# EAGLE board Power conditioning breakout (EAGLE 7.2.0)
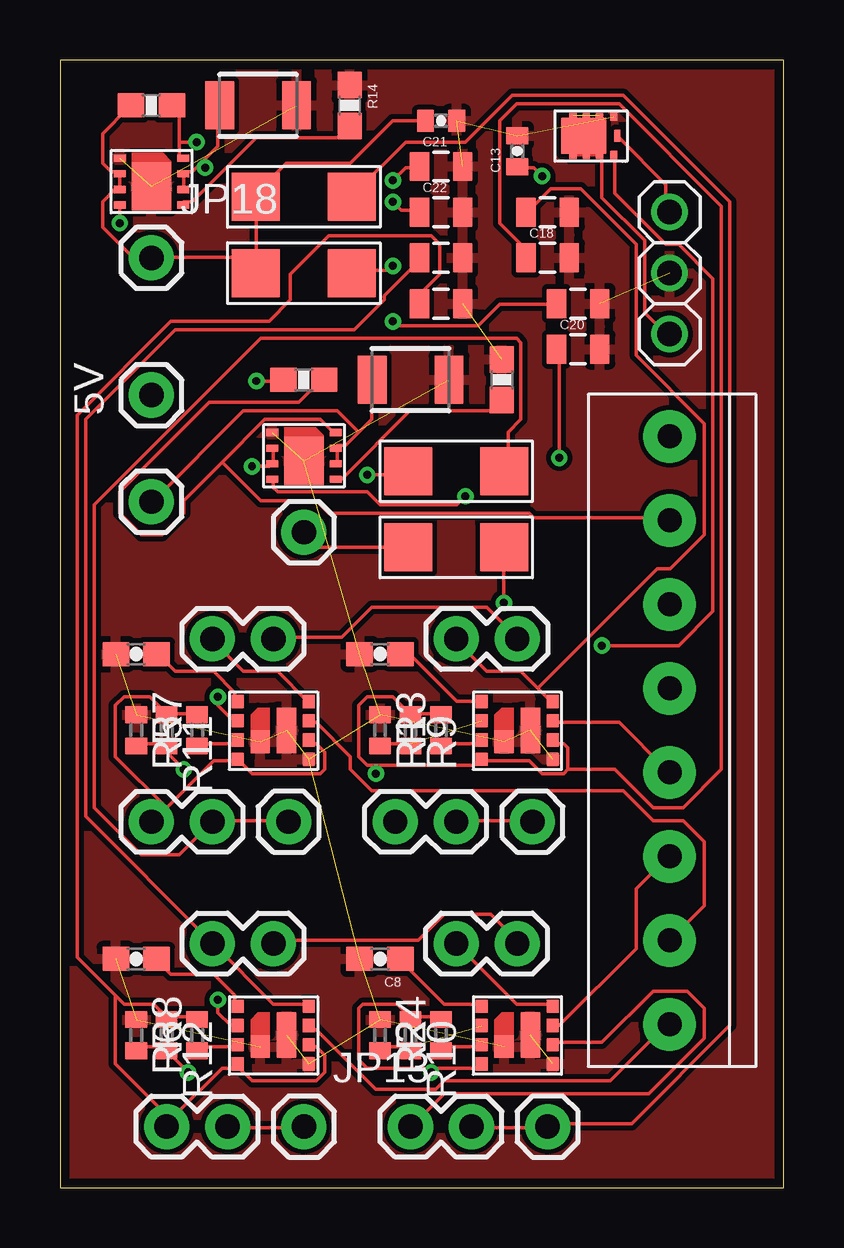
[diagram p0: board, top side]
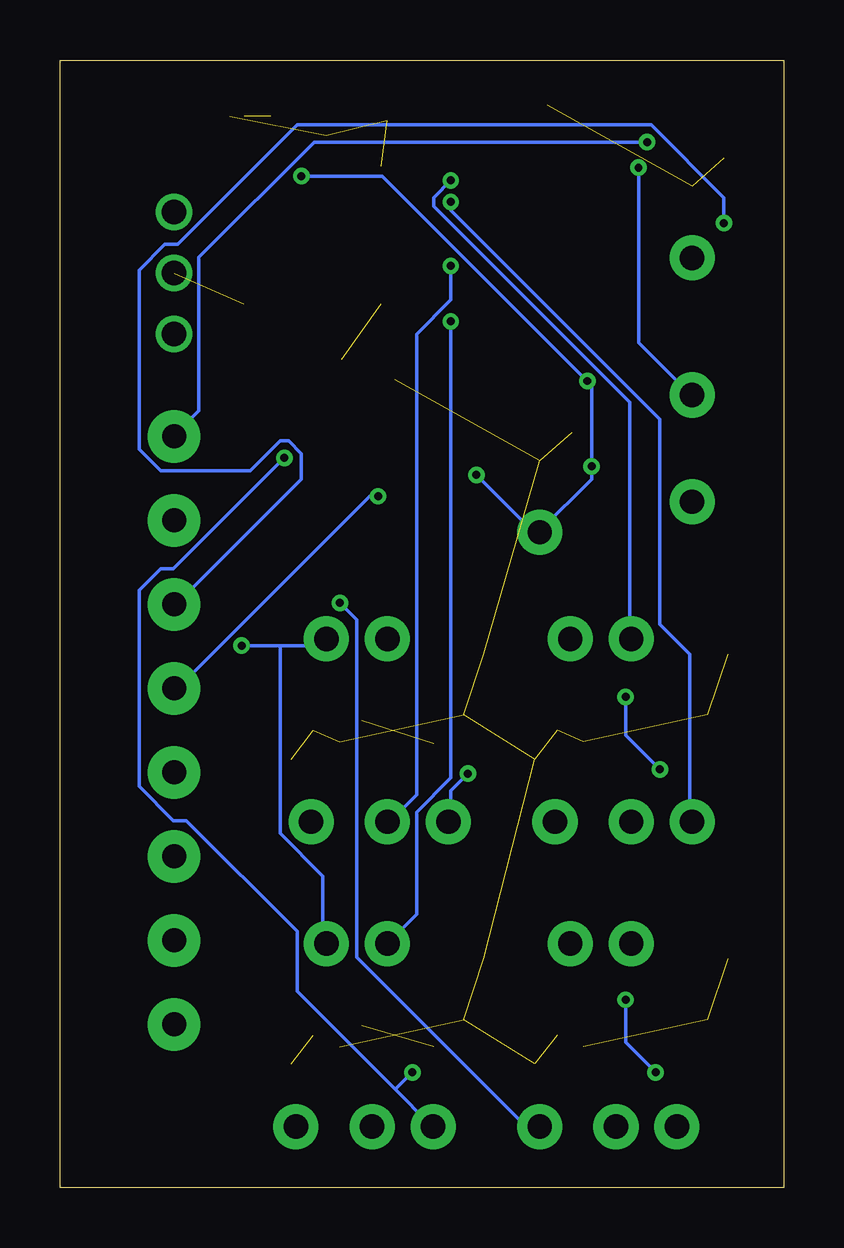
[diagram p1: board, bottom side, seen from below]

Size 30.15 x 46.98 mm. Coordinates in mm from the lower left corner, seen from the top.
Outline: 0,0 30.15,0 30.15,46.98 0,46.98 0,0
Copper layers (1*16): Top 0.0356mm / dielectric 1.5011mm / Bottom 0.0356mm
Design rules "LaenPCBOrder *": minimum track width 6mil, minimum drill 13mil, track to track 8mil, track to pad 8mil, pad to pad 8mil, via to via 8mil, smd to smd 8mil, copper to edge 15mil, drill to drill 6mil, minimum pad ring 7mil, minimum via ring 7mil, stop-mask expansion 3mil, vias tented up to drill 0mil, thermal gap 10mil

## Footprints (pad centres in the part's own frame; a part is rotated, then mirrored left to right if it is on the bottom)
1X01 = drill 1.016 pad 1.88: 1 0,0
1210 = smd 1.2 x 2: 1 -1.6,0; 2 1.6,0
0603-CAP = smd 1.1 x 1: 1 -0.85,0; 2 0.85,0
0805 = smd 0.8 x 1.2: 1 -0.9,0; 2 0.9,0
0402-CAP = smd 0.7 x 0.9: 1 -0.65,0; 2 0.65,0
1X08-3.5MM = drill 1 pad 2.184: 1 -12.25,0; 2 -8.75,0; 3 -5.25,0; 4 -1.75,0; 5 1.75,0; 6 5.25,0; 7 8.75,0; 8 12.25,0
1X03 = drill 1.016: 1 -2.54,0; 2 0,0; 3 2.54,0
1X02 = drill 1.016 pad 1.88: 1 0,0; 2 2.54,0
R0402 = smd 0.7 x 0.9: 1 -0.65,0; 2 0.65,0
0603-RES = smd 1.1 x 1: 1 -0.85,0; 2 0.85,0
CHIPFET = smd 1.5 x 1.87: P$1 0,0.4 | smd 0.2 x 0.3: P$2 -0.85,0.85; P$3 -0.85,0.3; P$4 -0.85,-0.25; P$8 0.85,-0.25; P$9 0.85,0.3; P$10 0.85,0.85 | smd 0.35 x 0.3: P$5 -0.8,-0.85; P$7 0.8,-0.85 | smd 0.5 x 0.25: P$6 0,-1
LMZ21701 = smd 0.5 x 0.55: P$1 -1.475,1.2; P$2 -1.475,0.4; P$3 -1.475,-0.4; P$4 -1.475,-1.2; P$5 1.475,-1.2; P$6 1.475,-0.4; P$7 1.475,0.4; P$8 1.475,1.2 | smd 0.8 x 1.9: P$9 0.55,0 | smd 0.8 x 0.95: P$10 -0.55,-0.475
TPS2556 = smd 0.5 x 0.3: P$1 -1.325,0.975; P$2 -1.325,0.325; P$3 -1.325,-0.325; P$4 -1.325,-0.975; P$5 1.325,-0.975; P$6 1.325,-0.325; P$7 1.325,0.325; P$8 1.325,0.975 | smd 1.65 x 2: P$9 0,-0.2
DO-214AC-SMA = smd 2 x 2: P$1 -2,0; P$2 2,0

## Placement (x,y rotation side)
5V  M01PTH  [1X01]  3.81,33.02 0 top
C3  150uF  [1210]  8.26,45.09 180 top
C4  150uF  [1210]  14.61,33.66 180 top
C5  3.3nF  [0603-CAP]  3.17,22.23 180 top
C6  3.3nF  [0603-CAP]  3.17,9.53 180 top
C7  3.3nF  [0603-CAP]  13.34,22.23 180 top
C8  3.3nF  [0603-CAP]  13.34,9.53 180 top
C9  22uF  [0805]  20.32,40.64 0 top
C13  .1uF  [0402-CAP]  19.05,43.18 90 top
C14  .1uF  [0402-CAP]  15.88,44.45 0 top
C18  22uF  [0805]  20.32,38.73 0 top
C19  22uF  [0805]  21.59,36.83 0 top
C20  22uF  [0805]  21.59,34.92 0 top
C21  22uF  [0805]  15.88,42.55 0 top
C22  22uF  [0805]  15.88,40.64 0 top
C23  22uF  [0805]  15.88,38.73 0 top
C24  22uF  [0805]  15.88,36.83 0 top
JP1  [1X08-3.5MM]  25.4,19.05 90 top
JP2  [1X03]  25.4,38.1 90 top
JP4  M01PTH  [1X01]  3.81,28.57 270 top
JP11  M01PTH  [1X01]  10.16,27.3 0 top
JP12  M01PTH  [1X01]  9.53,15.24 0 top
JP13  M01PTH  [1X01]  10.16,2.54 0 top
JP16  M01PTH  [1X01]  19.68,15.24 0 top
JP17  M01PTH  [1X01]  20.32,2.54 0 top
JP18  M01PTH  [1X01]  3.81,38.73 0 top
JP19  M02PTH  [1X02]  6.35,10.16 0 top
JP20  M02PTH  [1X02]  6.99,2.54 180 top
JP21  M02PTH  [1X02]  6.35,22.86 0 top
JP22  M02PTH  [1X02]  3.81,15.24 0 top
JP23  M02PTH  [1X02]  16.51,22.86 0 top
JP24  M02PTH  [1X02]  16.51,15.24 180 top
JP25  M02PTH  [1X02]  19.05,10.16 180 top
JP26  M02PTH  [1X02]  17.14,2.54 180 top
R1  180K  [R0402]  13.34,19.05 270 top
R2  180K  [R0402]  13.34,6.35 270 top
R3  10K  [R0402]  15.88,19.05 90 top
R4  10K  [R0402]  15.88,6.35 90 top
R5  180K  [R0402]  3.17,19.05 270 top
R6  180K  [R0402]  3.17,6.35 270 top
R7  10K  [R0402]  5.71,19.05 90 top
R8  10K  [R0402]  5.71,6.35 90 top
R9  1.02M  [R0402]  14.61,19.05 270 top
R10  1.02M  [R0402]  14.61,6.35 270 top
R11  634K  [R0402]  4.45,19.05 270 top
R12  634K  [R0402]  4.45,6.35 270 top
R13  20K  [0603-RES]  18.41,33.66 270 top
R14  20K  [0603-RES]  12.06,45.09 270 top
R15  100K  [0603-RES]  10.16,33.66 180 top
R16  100K  [0603-RES]  3.81,45.09 180 top
U$1  SI5410DU  [CHIPFET]  22.23,43.81 90 top
U$2  LMZ21701  [LMZ21701]  19.05,19.05 0 top
U$3  LMZ21701  [LMZ21701]  19.05,6.35 0 top
U$4  LMZ21701  [LMZ21701]  8.89,19.05 0 top
U$5  LMZ21701  [LMZ21701]  8.89,6.35 0 top
U$6  TPS2556  [TPS2556]  3.81,41.91 0 top
U$7  TPS2556  [TPS2556]  10.16,30.48 0 top
U$8  MBRA210LT3  [DO-214AC-SMA]  16.51,26.67 0 top
U$9  MBRA210LT3  [DO-214AC-SMA]  16.51,29.84 0 top
U$10  MBRA210LT3  [DO-214AC-SMA]  10.16,38.1 0 top
U$11  MBRA210LT3  [DO-214AC-SMA]  10.16,41.27 0 top

## Library data of the parts
5V JP4 JP11-JP13 JP16-JP26 = SparkFun-Connectors
C3 C4 = SparkFun-Capacitors; PROD_ID: CAP-09827
C5-C8 = SparkFun-Capacitors; PROD_ID: CAP-09633
C9 C18-C24 = SparkFun-Capacitors; PROD_ID: CAP-08402
C13 C14 R13-R16 = SparkFun-Passives
JP1 JP2 = adafruit
R1-R12 = resistor
U$1-U$11 = RitLaunchInitiative

## Nets
3.3V: C13.1 JP11.1 R15.2 U$7.P$2 U$7.P$3 U$8.P$1 U$9.P$1
+5V: C14.1 JP18.1 R16.2 U$6.P$2 U$6.P$3 U$10.P$1 U$11.P$1
EN1: JP2.3 U$1.P$6
EN31: JP1.1 U$5.P$7
EN32: JP1.2 U$4.P$7
EN51: JP1.3 U$3.P$7
EN52: JP1.4 U$2.P$7
ENT1: JP1.5 U$7.P$4
ENT2: JP1.6 U$6.P$4
F1: JP1.7 R15.1 U$7.P$8
F2: JP1.8 R16.1 U$6.P$8
GND: C3.1 C4.1 C5.2 C6.2 C7.2 C8.2 C9.2 C13.2 C14.2 C18.2 C19.2 C20.2 C21.2 C22.2 C23.2 C24.2 JP2.2 R1.1 R2.1 R5.1 R6.1 R13.1 R14.1 U$1.P$7 U$2.P$5 U$2.P$9 U$2.P$10 U$3.P$5 U$3.P$9 U$3.P$10 U$4.P$5 U$4.P$9 U$4.P$10 U$5.P$5 U$5.P$9 U$5.P$10 U$6.P$1 U$6.P$9 U$7.P$1 U$7.P$9
N$1: C20.1 JP26.2 R4.2 R10.1 U$3.P$4 U$3.P$6
N$2: R4.1 U$3.P$3
N$3: R3.1 U$2.P$3
N$4: R1.2 R9.2 U$2.P$2
N$5: C4.2 JP4.1 U$7.P$6 U$7.P$7
N$6: C7.1 U$2.P$1
N$7: U$1.P$8 U$1.P$9 U$1.P$10
N$8: R5.2 R11.2 U$4.P$2
N$9: R2.2 R10.2 U$3.P$2
N$10: JP12.1 JP22.2 U$9.P$2
N$11: C8.1 U$3.P$1
N$12: C5.1 U$4.P$1
N$13: R7.1 U$4.P$3
N$14: 5V.1 C3.2 U$6.P$6 U$6.P$7
N$15: JP2.1 U$1.P$1 U$1.P$2 U$1.P$3 U$1.P$4
N$16: R13.2 U$7.P$5
N$17: R14.2 U$6.P$5
N$18: C22.1 JP22.1 R7.2 R11.1 U$4.P$4 U$4.P$6
N$19: C6.1 U$5.P$1
N$20: C21.1 JP21.1 U$4.P$8
N$21: C24.1 JP20.2 R8.2 R12.1 U$5.P$4 U$5.P$6
N$22: R8.1 U$5.P$3
N$23: R6.2 R12.2 U$5.P$2
N$24: C23.1 JP19.1 U$5.P$8
N$25: JP13.1 JP20.1 U$8.P$2
N$26: JP16.1 JP24.1 U$10.P$2
N$27: JP17.1 JP26.1 U$11.P$2
N$28: C9.1 JP23.1 U$2.P$8
N$29: C19.1 JP25.2 U$3.P$8
N$31: C18.1 JP24.2 R3.2 R9.1 U$2.P$4 U$2.P$6
VIN: JP19.2 JP21.2 JP23.2 JP25.1 U$1.P$5

## Tracks (layer width: path | path; a pad name or v marks a point on that pad's centre or on a via)
3.3V  (via drill 0.33)
  Top 0.152: U$7.P$2 8.89,30.76 8.89,30.23 U$7.P$3 8.71,30.05 v8,30.05 | v20.09,42.14 19.74,42.49 19.2,42.49 C13.1 | v8.18,33.6 9.25,33.6 R15.2 | U$8.P$1 10.85,26.67 10.31,27.2 JP11.1 | v12.8,29.69 14.4,29.69 U$9.P$1
  Bottom 0.152: v20.09,42.14 16.71,42.14 v8.18,33.6 8,33.43 v8,30.05 8,29.52 10.13,27.38 JP11.1 10.31,27.2 v12.8,29.69
+5V
  Top 0.152: R16.2 2.85,44.98 1.78,43.92 1.78,42.67 2.13,42.32 2.31,42.32 U$6.P$2 2.49,42.14 2.49,41.6 U$6.P$3 2.31,41.6 1.78,41.07 1.78,40.01 3.02,38.76 3.73,38.76 JP18.1 3.91,38.76 8.18,38.76 | C14.1 13.87,44.45 12.09,42.67 9.42,42.67 8.18,41.43 U$11.P$1 8.18,41.25 8.18,38.76 | 8.18,38.76 8.18,38.23 U$10.P$1 8.18,38.76
EN1
  Top 0.152: U$1.P$6 23.29,43.74 25.25,41.78 25.25,40.72 JP2.3
EN31
  Top 0.152: U$5.P$7 10.49,6.58 10.67,6.58 13.16,4.09 15.65,4.09 16,4.45 22.94,4.45 25.25,6.76 JP1.1
EN32
  Top 0.152: U$4.P$7 10.49,19.38 10.67,19.38 12.09,17.96 12.09,17.42 12.98,16.54 23.47,16.54 24.71,15.29 25.96,15.29 26.85,14.4 26.85,11.73 25.43,10.31 JP1.2
EN51
  Top 0.152: U$3.P$7 20.62,6.76 20.8,6.76 24,9.96 24,12.45 25.25,13.69 JP1.3
EN52
  Top 0.152: U$2.P$7 20.62,19.38 23.29,19.38 25.25,17.42 JP1.4
ENT1  (via drill 0.33)
  Top 0.152: v16.89,28.8 16.54,28.45 13.34,28.45 12.8,28.98 9.07,28.98 8.89,29.16 8.89,29.52 U$7.P$4
  Bottom 0.152: v16.89,28.8 17.25,28.8 25.25,20.8 JP1.5
ENT2  (via drill 0.33)
  Top 0.152: v2.49,40.18 2.49,40.89 U$6.P$4
  Bottom 0.152: v2.49,40.18 2.49,41.25 5.51,44.27 20.27,44.27 25.25,39.29 25.78,39.29 26.85,38.23 26.85,30.76 25.96,29.87 22.23,29.87 20.98,31.11 20.62,31.11 20.09,30.58 20.09,29.52 25.25,24.36 JP1.6
F1
  Top 0.152: 6.76,30.23 5.16,28.63 5.16,28.09 4.27,27.2 3.38,27.2 2.49,28.09 2.49,28.98 6.22,32.72 9.96,32.72 10.85,33.6 R15.1 | 6.76,30.23 8.53,32 10.85,32 11.38,31.47 U$7.P$8 | 6.76,30.23 8.36,28.63 10.67,28.63 11.2,28.09 19.56,28.09 19.74,27.91 25.25,27.91 JP1.7
F2  (via drill 0.33)
  Top 0.152: 4.98,43.56 4.98,44.81 4.8,44.98 R16.1 | 4.98,43.56 4.98,43.03 U$6.P$8 | v5.69,43.56 4.98,43.56
  Bottom 0.152: v5.69,43.56 19.56,43.56 24.36,38.76 24.36,32.36 25.25,31.47 JP1.8
GND  (27 unrouted)
  pour Top: -1.27,48.26 -1.27,-1.27 31.75,-1.27 31.75,48.26
N$1  (via drill 0.33)
  Top 0.152: 15.47,4.98 12.8,4.98 12.45,5.33 12.45,7.47 12.62,7.64 14.05,7.64 14.58,7.11 R10.1 14.76,7.11 15.82,7.11 R4.2 | 15.47,4.98 17.42,4.98 U$3.P$4 | U$3.P$6 20.62,6.04 22.58,6.04 24.71,8.18 26.14,8.18 26.85,7.47 26.85,6.22 24.54,3.91 16,3.91 14.76,2.67 JP26.2 | v20.8,30.4 20.8,34.85 C20.1 | v15.47,4.8 15.47,4.98
  Bottom 0.152: v20.8,30.4 25.43,25.78 25.96,25.78 26.85,24.89 26.85,16.71 25.43,15.29 24.89,15.29 20.27,10.67 20.27,8.18 16.18,4.09 | 16.18,4.09 14.76,2.67 JP26.2 | 16.18,4.09 v15.47,4.8
N$2
  Top 0.152: U$3.P$3 17.42,5.87 16,5.87 R4.1
N$3
  Top 0.152: U$2.P$3 17.42,18.49 16,18.49 R3.1
N$4  (1 unrouted)
  Top 0.152: R1.2 13.34,18.49 14.58,18.49 R9.2
N$5
  Top 0.152: U$7.P$6 11.56,30.23 11.56,30.76 U$7.P$7 11.56,30.94 11.91,30.94 12.45,31.47 | 12.45,31.47 12.98,32 12.98,33.6 C4.2 | 12.45,31.47 11.56,32.36 7.64,32.36 3.91,28.63 JP4.1
N$6
  Top 0.152: C7.1 14.58,22.23 16.54,20.27 17.42,20.27 U$2.P$1
N$7  (2 unrouted)
N$8  (via drill 0.33)
  Top 0.152: v6.58,20.45 6.58,20.09 7.11,19.56 7.29,19.56 U$4.P$2 | v5.16,17.42 4.45,18.14 R11.2 4.45,18.49 3.2,18.49 R5.2
  Bottom 0.152: v6.58,20.45 6.58,18.85 v5.16,17.42
N$9  (1 unrouted)
  Top 0.152: R2.2 13.34,5.87 14.58,5.87 R10.2
N$10
  Top 0.152: U$9.P$2 18.67,29.87 18.67,31.47 19.2,32 19.2,35.2 19.02,35.38 8.36,35.38 1.42,28.45 1.42,15.82 3.38,13.87 4.98,13.87 JP22.2 6.4,15.29 9.42,15.29 JP12.1
N$11
  Top 0.152: U$3.P$1 17.42,7.64 16,7.64 14.22,9.42 C8.1
N$12
  Top 0.152: U$4.P$1 7.29,20.27 7.29,20.62 6.4,21.51 4.8,21.51 4.09,22.23 C5.1
N$13
  Top 0.152: U$4.P$3 7.29,18.49 5.87,18.49 R7.1
N$14  (via drill 0.33)
  Top 0.152: U$6.P$6 5.16,41.6 5.16,42.14 U$6.P$7 5.16,42.32 5.51,42.32 5.87,42.67 | 5.87,42.67 6.58,43.38 6.58,44.98 C3.2 | v6.04,42.49 5.87,42.67
  Bottom 0.152: v6.04,42.49 6.04,35.2 3.91,33.07 5V.1
N$15
  Top 0.152: 21.87,43.03 21.51,43.03 U$1.P$2 | 21.87,43.03 21.87,43.74 U$1.P$1 | 21.87,43.03 U$1.P$3 22.05,43.03 22.4,43.03 U$1.P$4 22.58,43.03 22.58,41.25 24.36,39.47 24.36,36.45 25.25,35.56 JP2.1
N$16
  Top 0.152: U$7.P$5 11.56,29.52 11.73,29.52 14.58,32.36 17.96,32.36 18.31,32.72 R13.2
N$17
  Top 0.152: U$6.P$5 5.16,41.07 5.51,41.07 8.18,43.74 11.56,43.74 11.91,44.09 R14.2
N$18  (via drill 0.33)
  Top 0.152: 4.45,19.74 5.69,19.74 R7.2 | 4.45,15.82 3.91,15.29 JP22.1 4.45,15.82 | 4.45,15.82 6.4,17.78 7.29,17.78 U$4.P$4 7.47,17.78 8,17.25 10.85,17.25 11.02,17.42 11.02,18.14 10.67,18.49 10.49,18.49 U$4.P$6 | v13.87,41.07 14.22,40.72 14.94,40.72 C22.1 | 4.45,19.74 3.73,20.45 2.67,20.45 2.31,20.09 2.31,17.96 4.45,15.82 | 4.45,19.74 R11.1
  Bottom 0.152: v13.87,41.07 13.87,40.72 5.16,32 5.16,23.47 3.91,22.23 3.91,15.29 JP22.1
N$19
  Top 0.152: U$5.P$1 7.29,7.64 7.29,8 6.4,8.89 4.62,8.89 4.09,9.42 C6.1
N$20  (via drill 0.33)
  Top 0.152: U$4.P$8 10.31,20.27 9.07,21.51 7.64,21.51 6.4,22.76 JP21.1 | v13.87,41.96 14.4,42.49 14.94,42.49 C21.1
  Bottom 0.152: v13.87,41.96 14.58,41.25 14.58,40.89 6.4,32.72 6.4,22.94 JP21.1
N$21
  Top 0.152: 4.62,2.85 4.45,2.67 JP20.2 4.62,2.85 | 4.62,2.85 6.76,4.98 7.29,4.98 U$5.P$4 7.47,4.98 8,4.45 10.67,4.45 11.02,4.8 11.02,5.51 10.67,5.87 10.49,5.87 U$5.P$6 | 4.45,7.11 5.69,7.11 R8.2 | 2.31,8 2.67,7.64 3.91,7.64 4.45,7.11 | 2.31,8 0.71,9.6 0.71,32.18 4.62,36.09 8.71,36.09 9.6,36.98 9.6,38.05 11.2,39.65 15.47,39.65 15.82,39.29 15.82,38.05 15.11,37.34 15.11,36.98 C24.1 | 4.45,7.11 R12.1 | 4.62,2.85 2.31,5.16 2.31,8
N$22
  Top 0.152: U$5.P$3 7.29,5.87 5.87,5.87 R8.1
N$23  (via drill 0.33)
  Top 0.152: v6.58,7.82 6.58,7.29 7.11,6.76 7.29,6.76 U$5.P$2 | v5.33,4.8 R12.2 4.45,5.87 3.2,5.87 R6.2
  Bottom 0.152: v6.58,7.82 6.58,6.04 v5.33,4.8
N$24
  Top 0.152: U$5.P$8 10.31,7.64 8.89,7.64 6.4,10.13 JP19.1 6.22,10.31 1.07,15.47 1.07,32 4.8,35.74 12.27,35.74 13.51,36.98 13.51,37.16 14.94,38.58 C23.1
N$25  (via drill 0.33)
  Top 0.152: v18.49,24.36 18.49,26.67 U$8.P$2 | JP20.1 7.11,2.49 10.13,2.49 JP13.1
  Bottom 0.152: v18.49,24.36 17.78,23.65 17.78,9.6 10.85,2.67 10.31,2.67 JP13.1
N$26  (via drill 0.33)
  Top 0.152: v13.87,38.41 13.69,38.23 12.27,38.23 U$10.P$2 | JP16.1 19.56,15.29 16.54,15.29 JP24.1
  Bottom 0.152: v13.87,38.41 13.87,36.98 15.29,35.56 15.29,16.36 16.36,15.29 JP24.1
N$27
  Top 0.152: U$11.P$2 12.27,41.43 14.4,43.56 16.89,43.56 18.85,45.52 23.47,45.52 27.91,41.07 27.91,6.76 23.82,2.67 20.45,2.67 JP17.1 20.27,2.49 17.25,2.49 JP26.1
N$28
  Top 0.152: 19.91,20.8 19.2,21.51 17.78,21.51 16.54,22.76 JP23.1 | 19.91,20.8 20.45,20.27 U$2.P$8 | 19.91,20.8 24.89,25.78 25.43,25.78 26.85,27.2 26.85,31.83 24,34.67 24,39.29 21.69,41.6 20.45,41.6 19.56,40.72 C9.1
N$29  (via drill 0.33)
  Top 0.152: JP25.2 19.02,7.64 20.45,7.64 U$3.P$8 | v13.87,36.09 14.05,35.92 17.42,35.92 18.31,36.8 20.62,36.8 C19.1
  Bottom 0.152: v13.87,36.09 13.87,17.07 15.29,15.65 15.29,11.38 JP25.2
N$31  (via drill 0.33)
  Top 0.152: R3.2 15.82,19.74 14.76,19.74 R9.1 14.58,19.74 13.87,20.45 12.8,20.45 12.45,20.09 12.45,17.96 12.8,17.6 13.16,17.6 | 21.16,17.42 20.98,17.25 20.09,17.25 19.56,17.78 17.6,17.78 U$2.P$4 17.42,17.78 17.25,17.6 13.16,17.6 | 21.16,17.42 21.16,18.31 20.98,18.49 20.62,18.49 U$2.P$6 | 21.16,17.42 23.11,17.42 24.71,15.82 25.96,15.82 27.56,17.42 27.56,40.89 23.29,45.16 19.02,45.16 18.31,44.45 18.31,40.18 19.38,39.12 19.38,38.76 C18.1 | 13.16,17.6 v13.16,17.25
  Bottom 0.152: v13.16,17.25 13.87,16.54 13.87,15.29 JP24.2
VIN  (via drill 0.33)
  Top 0.152: JP19.2 8.89,10.31 14.94,10.31 16,11.38 17.96,11.38 19.02,10.31 JP25.1 | v22.58,22.58 25.78,22.58 27.2,24 27.2,37.87 25.78,39.29 25.25,39.29 23.11,41.43 23.11,42.85 U$1.P$5 | JP21.2 8.89,22.94 11.73,22.94 12.98,24.18 17.78,24.18 19.02,22.94 JP23.2
  Bottom 0.152: 20.98,22.58 19.38,22.58 19.2,22.76 JP23.2 | 20.98,22.58 v22.58,22.58 | 20.98,22.58 20.98,14.76 19.2,12.98 19.2,10.31 JP25.1

## Text on the board
tValues: 3V